# EAGLE board main_brd (EAGLE 9.2.2)
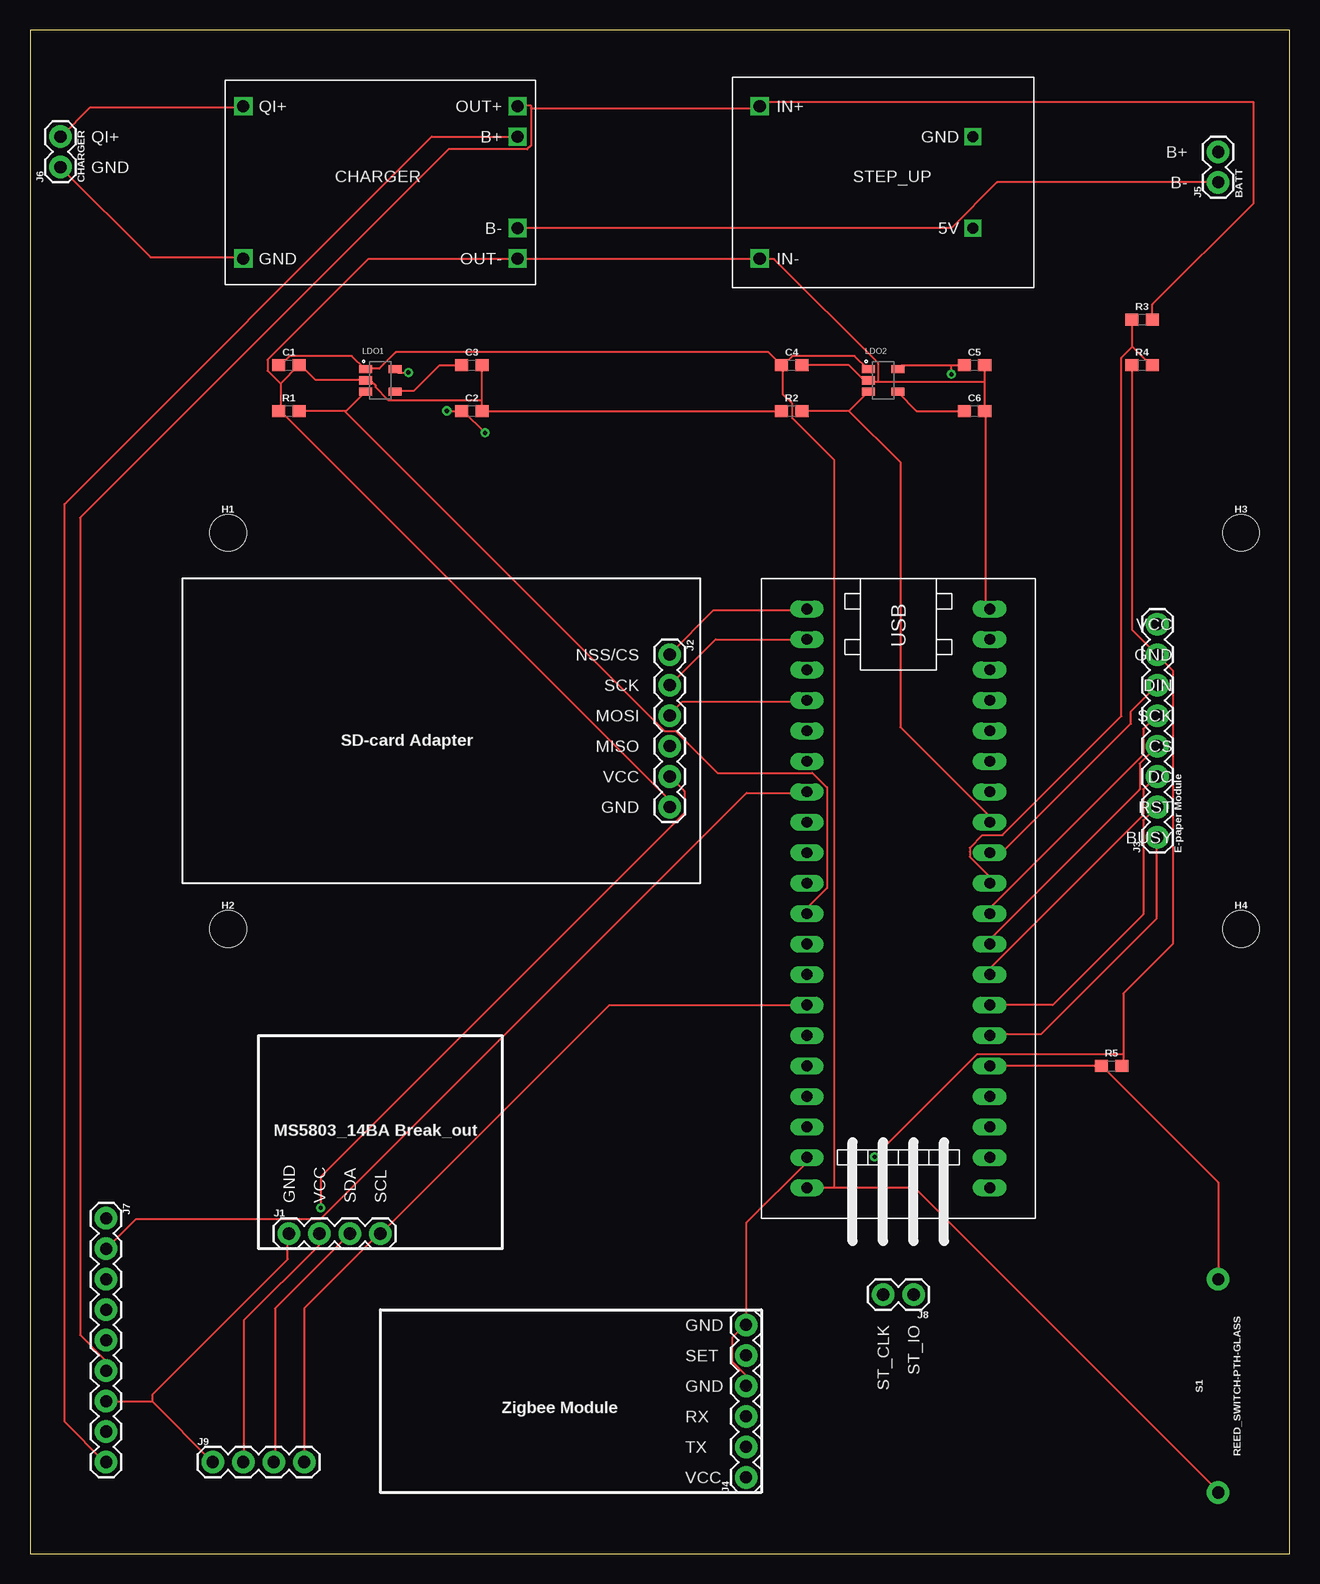
[diagram p0: board, top side]
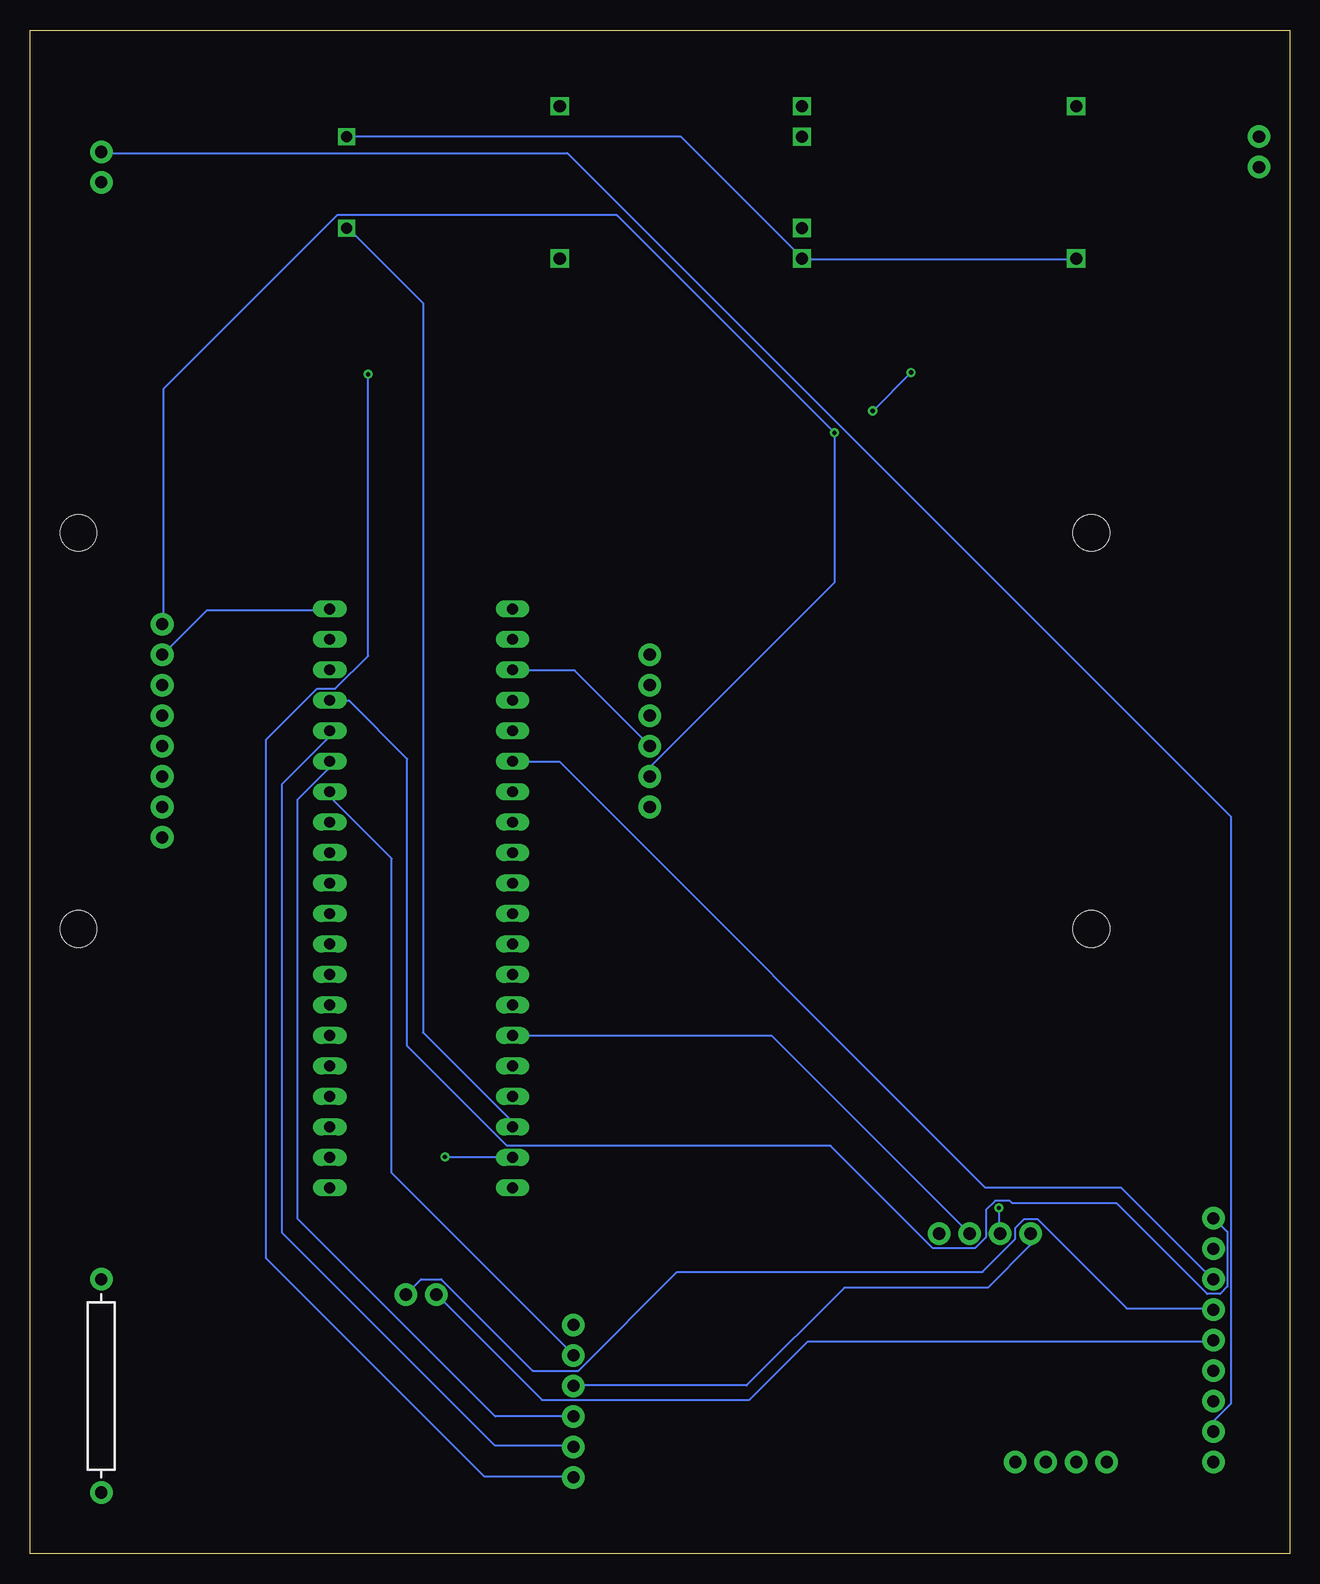
[diagram p1: board, bottom side, seen from below]

Size 105 x 127 mm. Coordinates in mm from the lower left corner, seen from the top.
Outline: 0,0 105,0 105,127 0,127 0,0
Copper layers (1*16): Top 0.035mm / dielectric 1.5mm / Bottom 0.035mm
Design rules "default *": minimum track width 6mil, minimum drill 0.35mm, track to track 8mil, track to pad 8mil, pad to pad 8mil, via to via 8mil, smd to smd 8mil, copper to edge 40mil, drill to drill 6mil, minimum pad ring 10mil, minimum via ring 8mil, stop-mask expansion 4mil, vias tented up to drill 0mil, thermal gap 10mil

## Footprints (pad centres in the part's own frame; a part is rotated, then mirrored left to right if it is on the bottom)
0603 = smd 1.1 x 1: 1 -0.85,0; 2 0.85,0
STAND-OFF-TIGHT = hole 3.048: 0,0
1X04 = drill 1.016 pad 1.88: 1 0,0; 2 2.54,0; 3 5.08,0; 4 7.62,0
1X06 = drill 1.016 pad 1.88: 1 0,0; 2 2.54,0; 3 5.08,0; 4 7.62,0; 5 10.16,0; 6 12.7,0
1X08 = drill 1.016 pad 1.88: 1 0,0; 2 2.54,0; 3 5.08,0; 4 7.62,0; 5 10.16,0; 6 12.7,0; 7 15.24,0; 8 17.78,0
1X02 = drill 1.016 pad 1.88: 1 0,0; 2 2.54,0
1X09 = drill 1.016 pad 1.88: 1 0,0; 2 2.54,0; 3 5.08,0; 4 7.62,0; 5 10.16,0; 6 12.7,0; 7 15.24,0; 8 17.78,0; 9 20.32,0
SOT94P279X129-5N = smd 1.17 x 0.67: 1 -1.22,0.94; 2 -1.22,0; 3 -1.22,-0.94; 4 1.22,-0.94; 5 1.22,0.94
REED_SWITCH_GLASS = drill 1.016 pad 1.88: P$1 -8.89,0; P$2 8.89,0
STM32F103C8T6-MODULE = drill 0.9 long: 3.3V_1 25.4,-7.62; 3.3V_2 -17.78,7.62; 5V 20.32,-7.62; GND_1 22.86,-7.62; GND_2 -20.32,7.62; GND_3 -22.86,7.62; PA_0 15.24,7.62; PA_1 12.7,7.62; PA_2 10.16,7.62; PA_3 7.62,7.62; PA_4 5.08,7.62; PA_5 2.54,7.62; PA_6 0,7.62; PA_7 -2.54,7.62; PA_8 -12.7,-7.62; PA_9 -10.16,-7.62; PA_10 -7.62,-7.62; PA_11 -5.08,-7.62; PA_12 -2.54,-7.62; PA_15 0,-7.62; PB_0 -5.08,7.62; PB_1 -7.62,7.62; PB_3 2.54,-7.62; PB_4 5.08,-7.62; PB_5 7.62,-7.62; PB_6 10.16,-7.62; PB_7 12.7,-7.62; PB_8 15.24,-7.62; PB_9 17.78,-7.62; PB_10 -10.16,7.62; PB_11 -12.7,7.62; PB_12 -22.86,-7.62; PB_13 -20.32,-7.62; PB_14 -17.78,-7.62; PB_15 -15.24,-7.62; PC_13 22.86,7.62; PC_14 20.32,7.62; PC_15 17.78,7.62; RESET -15.24,7.62; VB 25.4,7.62
CHARGE_MODULE = drill 1.016 square: + -11.43,6.35; - -11.43,-6.35; B+ 11.43,3.81; B- 11.43,-3.81; OUT+ 11.43,6.35; OUT- 11.43,-6.35
STEP_UP_99_69 = drill 0.9 square: 5V 7.493,-3.81; GND 7.493,3.81 | drill 1.016 square: IN+ -10.287,6.35; IN- -10.287,-6.35

## Placement (x,y rotation side)
C1  1.0uF  [0603]  21.59,99.06 0 top
C2  1.0uF  [0603]  36.83,95.25 0 top
C3  22nF  [0603]  36.83,99.06 0 top
C4  1.0uF  [0603]  63.5,99.06 0 top
C5  1.0uF  [0603]  78.74,99.06 0 top
C6  22nF  [0603]  78.74,95.25 0 top
H1  STAND-OFFTIGHT  [STAND-OFF-TIGHT]  16.51,85.09 0 top
H2  STAND-OFFTIGHT  [STAND-OFF-TIGHT]  16.51,52.07 0 top
H3  STAND-OFFTIGHT  [STAND-OFF-TIGHT]  100.97,85.09 0 top
H4  STAND-OFFTIGHT  [STAND-OFF-TIGHT]  100.97,52.07 0 top
J1  MS5803_14BA Break_out  [1X04]  21.59,26.67 0 top
J2  SD-card Adapter  [1X06]  53.34,74.93 270 top
J3  E-paper Module  [1X08]  93.98,59.69 90 top
J4  Zigbee Module  [1X06]  59.69,6.35 90 top
J5  BATT  [1X02]  99.06,114.3 90 top
J6  CHARGER  [1X02]  2.54,115.57 90 top
J7  POGO_PINS  [1X09]  6.35,27.94 270 top
J8  ST-LINK  [1X02]  73.66,21.59 180 top
J9  additional I2C bus  [1X04]  15.24,7.62 0 top
LDO1  RT9193-33GB  [SOT94P279X129-5N]  29.21,97.79 0 top
LDO2  RT9193-33GB  [SOT94P279X129-5N]  71.12,97.79 0 top
R1  22k  [0603]  21.59,95.25 0 top
R2  22k  [0603]  63.5,95.25 0 top
R3  22k  [0603]  92.71,102.87 0 top
R4  22k  [0603]  92.71,99.06 0 top
R5  22k  [0603]  90.17,40.64 0 top
S1  REED_SWITCH-PTH-GLASS  [REED_SWITCH_GLASS]  99.06,13.97 270 bottom
U1  STM32F103C8T6-MODULE  [STM32F103C8T6-MODULE]  72.39,55.88 270 top
U$1  4065_BREAKOUT  [CHARGE_MODULE]  29.21,114.3 0 top
U$2  STEP_UP  [STEP_UP_99_69]  71.12,114.3 0 top

## Library data of the parts
C1 C2 C4 C5 = SparkFun-Capacitors; PROD_ID: CAP-13930
C3 C6 = SparkFun-Capacitors; PROD_ID: CAP-07885
H1-H4 = SparkFun-Hardware
J1 J9 = SparkFun-Connectors; PROD_ID: CONN-09696
J2 J4 = SparkFun-Connectors; PROD_ID: CONN-08437
J3 = SparkFun-Connectors; PROD_ID: CONN-08438
J5-J8 = SparkFun-Connectors
LDO1 LDO2 = RT9193-33GB; DESCRIPTION: RT9193 Series 300 mA 3.3 V Ultra-Low Noise Ultra-Fast CMOS LDO Regulator-SC-70-5; DIGI-KEY_PART_NUMBER: 1028-1014-1-ND; DIGI-KEY_PURCHASE_URL: https://www.digikey.com/product-detail/en/richtek-usa-inc/RT9193-33GB/1028-1014-1-ND/2470073?utm_source=snapeda&utm_medium=aggregator&utm_campaign=symbol; MF: Richtek USA; MP: RT9193-33GB; PACKAGE: SOT-23-5 Richtek
R1-R5 = SparkFun-Resistors; PROD_ID: RES-07853
S1 = SparkFun-Switches; PROD_ID: SWCH-09282; SF_SKU: COM-08642
U1 = stm32f103c8t6_module
U$1 U$2 = coral_power

## Nets
3.3V: C1.1 C4.1 LDO1.1 LDO2.1 S1.P$2 U1.3.3V_1
5V: U1.5V U$2.5V
ADC_BATT: R3.1 R4.2 U1.PA_6
B+0: J7.9 U$1.B+
B+1: J5.2 J7.8
B-: J5.1 U$1.B-
E-INK_BUSY: J3.1 U1.PA_1
E-INK_DC: J3.3 U1.PA_3
E-INK_RST: J3.2 U1.PA_2
GND: C1.2 C2.2 C3.2 C4.2 C5.2 C6.2 J1.1 J2.6 J3.7 J4.4 J4.6 J6.1 J7.7 J9.1 LDO1.2 LDO2.2 R1.1 R2.1 R4.1 R5.2 U1.GND_1 U1.GND_3 U$1.- U$1.OUT- U$2.GND U$2.IN-
I2C_SCL: J1.4 J9.4 U1.PB_6
I2C_SDA: J1.3 J9.3 U1.PB_7
LDO1_3.3V: C2.1 J1.2 J2.5 J3.8 J9.2 LDO1.5
LDO1_EN: LDO1.3 R1.2 U1.PB_3
LDO2_3.3V: C5.1 J4.1 LDO2.5
LDO2_EN: LDO2.3 R2.2 U1.PB_0
N$1: C6.1 LDO2.4
N$2: C3.1 LDO1.4
N$10: R5.1 S1.P$1 U1.PA_0
QI+: J6.2 U$1.+
RST: J7.1 U1.RESET
RX: J7.2 U1.PA_10
SPI1_MOSI: J3.6 U1.PA_7
SPI1_NSS/CS: J3.4 U1.PA_4
SPI1_SCK: J3.5 U1.PA_5
SPI2_MISO: J2.4 U1.PB_14
SPI2_MOSI: J2.3 U1.PB_15
SPI2_NSS/CS: J2.1 U1.PB_12
SPI2_SCK: J2.2 U1.PB_13
ST_CLK: J7.5 J8.2
ST_IO: J7.4 J8.1
TX: J7.3 U1.PA_9
V_CHARGE: J7.6 R3.2 U$1.OUT+ U$2.IN+
ZIGBEE_RX: J4.3 U1.PB_10
ZIGBEE_SET: J4.5 U1.PB_1
ZIGBEE_TX: J4.2 U1.PB_11

## Tracks (layer width: path | path; a pad name or v marks a point on that pad's centre or on a via)
3.3V
  Top 0.152: C1.1 20.88,99.06 21.64,99.82 26.82,99.82 27.89,98.75 LDO1.1 28.04,98.75 29.11,98.75 30.48,100.13 61.57,100.13 62.64,99.06 C4.1 62.79,99.06 | 62.79,99.06 63.55,99.82 68.73,99.82 69.8,98.75 LDO2.1 | 67.06,30.48 73.76,30.48 99.06,5.18 S1.P$2 | 67.06,30.48 U1.3.3V_1 | 62.79,99.06 62.79,96.62 63.55,95.86 63.55,94.64 67.06,91.14 67.06,30.48
5V
  Bottom 0.152: U1.5V 64.77,35.97 72.24,43.43 72.24,104.24 78.49,110.49 U$2.5V
ADC_BATT
  Top 0.152: 91.9,100.58 91.9,102.87 R3.1 | 91.9,100.58 93.42,99.06 R4.2 | U1.PA_6 80.01,56.39 78.33,58.06 78.33,58.5 78.33,58.83 79.4,59.89 81.08,59.89 90.98,69.8 90.98,99.67 91.9,100.58
B+0
  Top 0.152: U$1.B+ 33.49,118.11 2.88,87.5 2.88,10.99 6.25,7.62 J7.9
B+1
  Bottom 0.152: J7.8 6.25,10.21 6.25,11.12 4.88,12.5 4.88,61.42 60.2,116.74 99.06,116.74 J5.2
B-
  Top 0.152: U$1.B- 76.81,110.49 80.62,114.3 J5.1
E-INK_BUSY
  Top 0.152: J3.1 93.88,59.59 93.88,52.88 84.28,43.28 80.01,43.28 U1.PA_1
E-INK_DC
  Top 0.152: U1.PA_3 80.01,48.77 92.81,61.57 92.81,63.7 93.88,64.77 J3.3
E-INK_RST
  Top 0.152: U1.PA_2 85.26,45.72 92.81,53.27 92.81,61.11 93.88,62.18 J3.2
GND  (via drill 0.35)
  Top 0.152: 37.64,96.16 37.64,99.06 C3.2 | 37.64,96.16 37.64,95.25 C2.2 R2.1 | 20.88,97.54 20.88,95.25 | 20.88,97.54 22.4,99.06 C1.2 22.55,99.06 23.77,97.84 27.89,97.84 LDO1.2 28.04,97.69 28.5,97.69 28.8,97.38 28.8,97.23 29.87,96.16 37.64,96.16 | J2.6 53.34,62.79 20.88,95.25 | 20.88,95.25 R1.1 | J6.1 10.06,108.05 17.68,108.05 U$1.- | 20.88,97.54 19.81,98.6 19.81,99.52 28.19,107.9 40.54,107.9 U$1.OUT- 40.69,107.9 60.81,107.9 U$2.IN- 60.96,107.9 62.03,107.9 70.71,99.21 70.71,97.69 | U1.GND_1 64.77,32.61 59.74,27.58 59.74,19.05 J4.6 59.59,19.05 58.52,17.98 58.52,16 59.59,14.94 59.59,14.02 J4.4 | 10.21,12.65 6.4,12.65 J7.7 | J9.1 10.21,12.65 | 10.21,12.65 10.21,13.26 21.49,24.54 21.49,26.67 J1.1 | 79.55,97.69 79.55,99.06 C5.2 | 79.55,97.69 79.55,95.25 C6.2 79.7,95.25 79.7,79.1 80.01,78.79 U1.GND_3 | C4.2 68.28,99.06 69.49,97.84 69.8,97.84 LDO2.2 69.95,97.69 70.71,97.69 | 70.71,97.69 79.55,97.69 | 91.14,41.6 91.14,46.68 95.25,50.8 95.25,73.61 94.03,74.83 J3.7 93.88,74.98 91.9,76.96 91.9,99.06 R4.1 | 91.14,41.6 91.14,40.69 R5.2 | v70.41,33.07 78.94,41.6 91.14,41.6
  Bottom 0.152: U$2.GND 50.75,118.11 40.69,108.05 U$1.OUT- 40.54,107.9 17.83,107.9 U$1.- | J1.1 21.59,25.72 25.15,22.16 37.12,22.16 45.26,14.02 59.59,14.02 J4.4 | U1.GND_3 80.01,78.64 90.22,78.64 93.88,74.98 J3.7 | v70.41,33.07 64.77,33.07 U1.GND_1
I2C_SCL
  Top 0.152: U1.PB_6 48.31,45.72 29.26,26.67 J1.4 29.11,26.67 22.86,20.42 J9.4
I2C_SDA
  Top 0.152: J1.3 20.42,20.42 20.42,7.62 J9.3
  Bottom 0.152: J1.3 43.13,43.13 64.77,43.13 U1.PB_7
LDO1_3.3V  (via drill 0.35)
  Top 0.152: J1.2 24.13,25.72 17.83,19.42 17.83,7.62 J9.2 | v34.75,95.25 C2.1 36.12,95.25 v37.95,93.42 | v31.55,98.45 30.63,98.45 30.48,98.6 LDO1.5 | v24.23,28.8 24.23,31.39 54.56,61.72 54.56,63.55 J2.5
  Bottom 0.152: v31.55,98.45 v34.75,95.25 | J2.5 53.34,65.53 37.95,80.92 v37.95,93.42 56.08,111.56 79.4,111.56 93.88,97.08 93.88,77.57 J3.8 | v24.23,28.8 24.23,26.67 J1.2
LDO1_EN
  Top 0.152: 26.21,95.25 26.36,95.25 27.89,96.77 LDO1.3 | 26.21,95.25 R1.2 | U1.PB_3 64.77,53.8 66.45,55.47 66.45,63.86 65.23,65.08 57.3,65.08 53.8,68.58 52.88,68.58 26.21,95.25
LDO2_3.3V  (via drill 0.35)
  Top 0.152: 76.81,99.06 72.69,99.06 72.39,98.75 LDO2.5 | 76.81,99.06 C5.1 | v76.81,98.3 76.81,99.06
  Bottom 0.152: v76.81,98.3 76.81,74.83 79.55,72.08 81.08,72.08 85.3,67.87 85.3,24.58 67.11,6.4 59.74,6.4 J4.1
LDO2_EN
  Top 0.152: 68.28,95.25 R2.2 | 68.28,95.25 69.8,96.77 LDO2.3 | U1.PB_0 80.01,61.42 72.54,68.89 72.54,90.98 68.28,95.25
N$1
  Top 0.152: C6.1 73.91,95.25 72.39,96.77 LDO2.4
N$2
  Top 0.152: C3.1 34.14,99.06 32,96.93 30.48,96.93 LDO1.4
N$10
  Top 0.152: U1.PA_0 80.01,40.69 89.31,40.69 R5.1 89.46,40.54 99.06,30.94 S1.P$1
QI+
  Top 0.152: U$1.+ 17.68,120.55 5.03,120.55 2.59,118.11 J6.2
RST
  Bottom 0.152: U1.RESET 78.42,71.12 73.54,66.25 73.54,42.3 65.23,33.98 38.25,33.98 29.72,25.45 26.21,25.45 25.3,26.36 25.3,28.65 24.54,29.41 23.32,29.41 23.1,29.19 14.41,29.19 6.86,21.64 5.79,21.64 5.18,22.25 5.18,26.82 6.25,27.89 J7.1
RX
  Top 0.152: J7.2 8.84,27.89 24.23,27.89 59.74,63.4 64.77,63.4 U1.PA_10
SPI1_MOSI
  Top 0.152: J3.6 91.79,70.2 91.79,69.17 81.03,58.42 U1.PA_7
SPI1_NSS/CS
  Top 0.152: U1.PA_4 80.01,51.21 92.51,63.7 92.51,65.84 J3.4
SPI1_SCK
  Top 0.152: U1.PA_5 80.01,53.8 92.81,66.6 92.81,68.73 93.88,69.8 J3.5
SPI2_MISO
  Bottom 0.152: U1.PB_14 64.77,73.61 59.59,73.61 53.34,67.36 J2.4
SPI2_MOSI
  Top 0.152: U1.PB_15 64.77,71.02 54.41,71.02 53.34,69.95 J2.3
SPI2_NSS/CS
  Top 0.152: U1.PB_12 64.77,78.64 57,78.64 53.34,74.98 J2.1
SPI2_SCK
  Top 0.152: U1.PB_13 57.15,76.2 J2.2
ST_CLK
  Bottom 0.152: J8.2 62.33,12.8 45.02,12.8 40.15,17.68 6.4,17.68 J7.5
ST_IO
  Bottom 0.152: J8.1 72.39,22.86 70.71,22.86 63.09,15.24 59.28,15.24 51.05,23.47 25.6,23.47 22.86,26.21 22.86,27.13 22.1,27.89 21.03,27.89 13.56,20.42 6.4,20.42 J7.4
TX
  Bottom 0.152: U1.PA_9 64.77,65.99 60.83,65.99 25.34,30.5 14.04,30.5 6.4,22.86 J7.3
V_CHARGE
  Top 0.152: R3.2 93.57,102.87 93.57,104.14 102,112.56 102,121 61.18,121 U$2.IN+ 60.68,120.5 41.76,120.5 | U$1.OUT+ 40.69,120.7 41.76,120.7 41.76,120.5 | 41.76,120.5 41.76,117.35 41.45,117.04 34.88,117.04 4.18,86.34 4.18,18.22 6.25,16.15 6.25,15.24 J7.6
ZIGBEE_RX
  Bottom 0.152: U1.PB_10 80.01,65.53 82.69,62.86 82.69,27.89 66.23,11.43 J4.3
ZIGBEE_SET
  Bottom 0.152: U1.PB_1 80.01,63.09 74.85,57.93 74.85,31.72 59.74,16.61 J4.5
ZIGBEE_TX
  Bottom 0.152: U1.PB_11 80.01,68.12 83.99,64.14 83.99,26.74 66.25,8.99 59.74,8.99 J4.2

## Text on the board
tPlace: QI+ | OUT+ | IN+ | QI+ | B+ | GND | B+ | GND | CHARGER | STEP_UP | B- | B- | 5V | GND | OUT- | IN- | VCC | NSS/CS | GND | SCK | DIN | MOSI | SCK | MISO | CS | VCC | DC | GND | RST | BUSY | GND | VCC | SDA | SCL | GND | ST_CLK | ST_IO | SET | GND | RX | TX | VCC